# EAGLE board beacon3v08tdip (EAGLE 6.1)
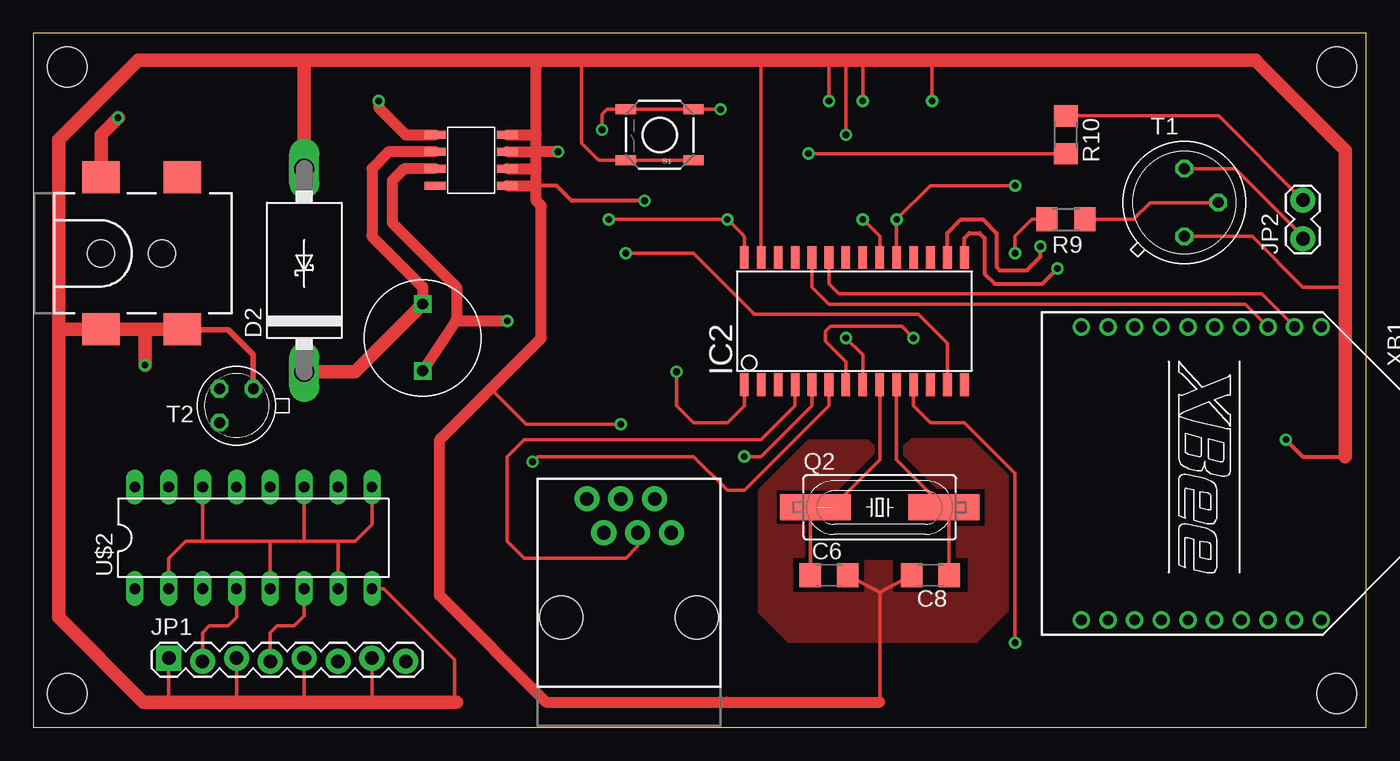
[diagram p0: board, top side]
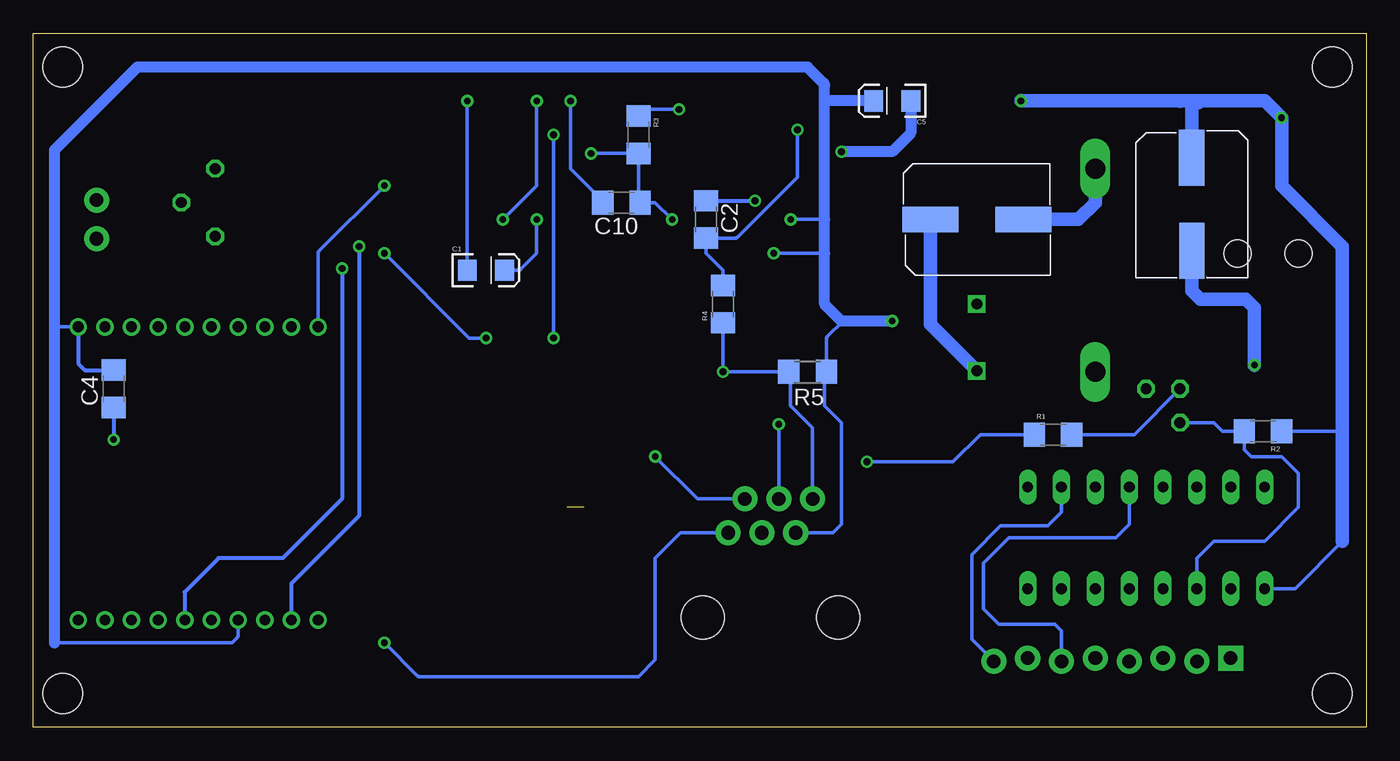
[diagram p1: board, bottom side, seen from below]

Size 100 x 52.06 mm. Coordinates in mm from the lower left corner, seen from the top.
Outline: 0,0 100,0 100,52.06 0,52.06 0,0
Copper layers (1*16): Top 0.035mm / dielectric 1.5mm / Bottom 0.035mm
Design rules: minimum track width 10mil, minimum drill 15mil, track to track 8mil, track to pad 8mil, pad to pad 5mil, via to via 8mil, smd to smd 8mil, copper to edge 40mil, drill to drill 8mil, minimum pad ring 10mil, minimum via ring 8mil, stop-mask expansion 4mil, vias tented up to drill 0mil, thermal gap 10mil
Holes 3 mm at 2.54,49.53 97.79,49.53 2.54,2.54 97.79,2.54

## Footprints (pad centres in the part's own frame; a part is rotated, then mirrored left to right if it is on the bottom)
EIA3216 = smd 1.4 x 1.6: A 1.4,0; C -1.4,0
C1206 = smd 1.6 x 1.8: 1 -1.4,0; 2 1.4,0
ECAPSMPS = smd 4.2 x 1.9: P$1 -3.481,-0.009; P$2 3.496,0.005
DO201T15 = drill 1.499 long: A 7.62,0; C -7.62,0
SO28W = smd 0.65 x 1.7: 1 -7.62,-4.78; 2 -6.35,-4.78; 3 -5.08,-4.78; 4 -3.81,-4.78; 5 -2.54,-4.78; 6 -1.27,-4.78; 7 0,-4.78; 8 1.27,-4.78; 9 2.54,-4.78; 10 3.81,-4.78; 11 5.08,-4.78; 12 6.35,-4.78; 13 7.62,-4.78; 14 8.89,-4.78; 15 8.89,4.78; 16 7.62,4.78; 17 6.35,4.78; 18 5.08,4.78; 19 3.81,4.78; 20 2.54,4.78; 21 1.27,4.78; 22 0,4.78; 23 -1.27,4.78; 24 -2.54,4.78; 25 -3.81,4.78; 26 -5.08,4.78; 27 -6.35,4.78; 28 -7.62,4.78
POWER_JACK_SMD = smd 2.8 x 2.4: GND 0,-5.7; P$4 6.1,-5.7; VIN0 0,5.7; VIN1 6.1,5.7 | hole 2.032: 0,0; 4.572,0
RJ11-6 = drill 1.016 pad 1.88: 1 1.905,8.89; 2 3.175,6.35; 3 4.445,8.89; 4 5.715,6.35; 5 6.985,8.89; 6 8.255,6.35 | hole 3.251: 0,0; 10.16,0
1X08_LOCK = drill 1.016 pad 1.88 square: 1 0,0.127 | drill 1.016 pad 1.88: 2 2.54,-0.127; 3 5.08,0.127; 4 7.62,-0.127; 5 10.16,0.127; 6 12.7,-0.127; 7 15.24,0.127; 8 17.78,-0.127
1X02_LOCK = drill 1.016 pad 1.88: 1 -0.178,0; 2 2.718,0
HC49UP = smd 5.334 x 1.93: 1 -4.826,0; 2 4.826,0
1206 = smd 1.6 x 1.8: 1 -1.4,0; 2 1.4,0
R1206 = smd 1.6 x 1.803: 1 -1.422,0; 2 1.422,0
TACTILE_SWITCH_SMD = smd 1.524 x 0.762: 1 -2.54,1.905; 2 2.54,1.905; 3 -2.54,-1.905; 4 2.54,-1.905
TO5 = drill 0.813 octagon: 1 0,-2.54; 2 2.54,0; 3 0,2.54
TO18 = drill 0.813 octagon: 1 -1.27,-1.27; 2 1.27,-1.27; 3 1.27,1.27
DIL16 = drill 0.813 long: 1 -8.89,-3.81; 2 -6.35,-3.81; 3 -3.81,-3.81; 4 -1.27,-3.81; 5 1.27,-3.81; 6 3.81,-3.81; 7 6.35,-3.81; 8 8.89,-3.81; 9 8.89,3.81; 10 6.35,3.81; 11 3.81,3.81; 12 1.27,3.81; 13 -1.27,3.81; 14 -3.81,3.81; 15 -6.35,3.81; 16 -8.89,3.81
BUCK = smd 1.55 x 0.6: P$5 -2.88,1.27; P$6 -2.88,0; P$7 -2.88,-1.27; P$8 -2.88,-2.54; P$9 2.54,-2.54; P$10 2.54,-1.27; P$11 2.54,0; P$12 2.54,1.27
BUCKINDUCTOR2 = drill 0.8 square: P$1 0,0; P$2 5,0
XBEE = drill 0.8 pad 1.27: 1 -11,9; 2 -11,7; 3 -11,5; 4 -11,3; 5 -11,1; 6 -11,-1; 7 -11,-3; 8 -11,-5; 9 -11,-7; 10 -11,-9; 11 11,-9; 12 11,-7; 13 11,-5; 14 11,-3; 15 11,-1; 16 11,1; 17 11,3; 18 11,5; 19 11,7; 20 11,9

## Placement (x,y rotation side)
C1  10uF  [EIA3216]  66.04,34.29 0 bottom
C2  .1uF  [C1206]  49.53,38.1 270 bottom
C4  .1uF  [C1206]  93.98,25.4 90 bottom
C5  [EIA3216]  35.56,46.99 180 bottom
C6  22pF  [C1206]  59.69,11.43 0 top
C8  22pF  [C1206]  67.31,11.43 180 top
C10  .1uF  [C1206]  55.88,39.37 180 bottom
C11  [ECAPSMPS]  13.08,39.24 270 bottom
C12  [ECAPSMPS]  29.21,38.1 0 bottom
D2  1N5820  [DO201T15]  20.32,34.29 90 top
IC2  PIC24FJ16GA002  [SO28W]  60.96,30.48 0 top
J1  POWER_JACKSMD  [POWER_JACK_SMD]  5.08,35.56 0 top
J2  RJ11-6PTH  [RJ11-6]  39.62,8.25 0 top
JP1  [1X08_LOCK]  10.16,5.08 0 top
JP2  [1X02_LOCK]  95.25,36.83 90 top
Q2  8MHz  [HC49UP]  63.5,16.51 0 top
R1  [1206]  23.5,21.97 0 bottom
R2  [1206]  7.75,22.22 180 bottom
R3  10k  [1206]  54.61,44.45 270 bottom
R4  200  [1206]  48.26,31.75 90 bottom
R5  4.7k  [R1206]  41.91,26.67 180 bottom
R9  [R1206]  77.47,38.1 180 top
R10  [R1206]  77.47,44.45 270 top
S1  [TACTILE_SWITCH_SMD]  46.99,44.45 180 top
T1  2N2405  [TO5]  86.36,39.37 0 top
T2  2N2222  [TO18]  15.24,24.13 180 top
U$2  CD4049  [DIL16]  16.51,14.22 0 top
U$3  BUCK1  [BUCK]  33.02,43.18 0 top
U$4  47uH  [BUCKINDUCTOR2]  29.21,31.75 270 top
XB1  XBEE  [XBEE]  87.63,19.05 270 top

## Library data of the parts
C1 C5 R1-R4 = SparkFun-Passives
C2 C4 C6 C8 C10 = resistor
C11 C12 IC2 U$2-U$4 = beacon
D2 = diode
J1 J2 JP1 JP2 = SparkFun-Connectors
Q2 = crystal; OC_FARNELL: unknown; OC_NEWARK: unknown
R5 R9 R10 = rcl
S1 = SparkFun-Electromechanical
T1 T2 = transistor
XB1 = maxstream; MPN: XBP24-Z7UIT-004; OC_FARNELL: 1751799; OC_NEWARK: 34R5507

## Nets
3.3V: C4.2 C5.A C10.1 C12.P$1 IC2.13 IC2.28 J2.2 R3.2 R5.1 R10.2 U$3.P$7 U$4.P$2 XB1.1 XB1.14
12V: C11.P$1 J1.VIN0 R2.1 U$2.1 U$3.P$5
GND: C1.C C2.1 C4.1 C5.C C6.2 C8.2 C10.2 C11.P$2 C12.P$2 D2.A IC2.8 IC2.19 IC2.27 J1.GND J1.P$4 J2.3 JP1.1 JP1.3 JP1.5 JP1.7 S1.1 S1.2 T1.1 T2.1 U$2.8 U$3.P$9 U$3.P$10 U$3.P$11 U$3.P$12 XB1.10
N$1: IC2.6 R1.1
N$2: R1.2 T2.2
N$3: JP1.2 U$2.4
N$4: JP2.2 R10.1
N$5: JP1.4 U$2.6
N$6: IC2.23 XB1.2
N$7: JP1.8 U$2.10
N$8: IC2.24 XB1.3
N$9: IC2.4 J2.4
N$10: C1.A IC2.20
N$11: C2.2 R3.1 R4.2 S1.3 S1.4
N$12: IC2.1 J2.1 R4.1 R5.2
N$13: IC2.16 XB1.12
N$14: D2.C U$3.P$6 U$4.P$1
N$15: R2.2 T2.3 U$2.3
N$16: IC2.7 R9.2
N$17: JP1.6 U$2.12
N$18: JP2.1 T1.3
N$19: IC2.5 J2.5
N$20: IC2.11 J2.6
N$21: U$2.2 U$2.5 U$2.7 U$2.9 U$2.11 U$2.14
N$22: C6.1 IC2.9 Q2.1
N$23: IC2.15 XB1.16
N$24: C8.1 IC2.10 Q2.2
N$25: R9.1 T1.2

## Tracks (layer width: path | path; a pad name or v marks a point on that pad's centre or on a via)
3.3V  (via drill 0.51)
  Top 0.254: 31.75,30.48 31.67,30.48 | IC2.28 53.34,36.73 arc45 53.27,36.9 v52.07,38.1 v43.18,38.1 | R10.2 58.23,43.03 arc-45 v58.17,43.05 | IC2.13 68.58,28.72 arc45 68.51,28.9 66.42,30.99 54.21,30.99 arc-45 54.03,31.06 49.53,35.56 v44.45,35.56
  Top 0.813: v35.56,30.48 31.75,30.48 31.75,33.02 27,37.77 arc-45 26.92,37.95 26.92,41.02 27.74,41.84 arc-45 27.92,41.91 U$3.P$7 | 31.67,30.48 U$4.P$2
  Bottom 0.254: v58.17,43.05 R3.2 54.61,39.5 C10.1 53.34,39.37 v52.07,38.1 | 39.27,30.48 40.41,29.33 arc-45 40.49,29.15 R5.1 40.64,26.52 40.64,24.13 39.37,22.86 39.37,15.24 40.01,14.61 J2.2 | v43.18,38.1 40.64,38.1 | v44.45,35.56 40.64,35.56 | XB1.14 84.63,6.92 arc45 84.7,6.74 85.09,6.35 98.42,6.35 | XB1.1 98.24,30.05 arc-45 98.42,29.98 98.42,29.97
  Bottom 0.305: XB1.1 96.63,27.29 96.14,26.8 C4.2
  Bottom 0.813: v35.56,30.48 39.27,30.48 arc45 39.44,30.55 40.64,31.75 40.64,35.56 40.64,38.1 40.64,46.99 | 40.64,46.99 40.64,48.16 arc-45 40.71,48.33 41.91,49.53 92.2,49.53 98.42,43.31 98.42,29.97 98.42,6.35 | C5.A 40.64,46.99
  Bottom 1.016: C12.P$1 32.69,30.23 U$4.P$2
12V  (via drill 0.51)
  Top 0.813: v25.91,46.99 25.91,46.48 27.94,44.45 U$3.P$5
  Top 1.016: J1.VIN0 5.08,44.45 v6.35,45.72
  Bottom 0.254: 1.91,16.38 1.78,16.51 | R2.1 2.03,22.22 1.78,22.48 | U$2.1 5.33,10.41 1.78,13.97
  Bottom 1.016: 1.78,13.97 1.78,16.51 1.78,22.48 1.78,36.07 6.35,40.64 v6.35,45.72 7.62,46.99 12.7,46.99 | 12.7,46.99 13.97,46.99 | 13.97,46.99 v25.91,46.99 | 13.98,46.98 13.97,46.99 | 12.58,46.87 12.7,46.99 | C11.P$1 13.09,46.6 12.7,46.99
GND  (via drill 0.51)
  Top 0.254: JP1.7 25.4,1.91 | JP1.5 20.32,1.91 | JP1.3 15.24,1.91 | JP1.1 10.16,2.16 10.41,1.91 | 31.75,1.91 31.62,2.03 31.62,5.08 26.29,10.41 U$2.8 | 23.62,49.68 arc-45 23.7,49.86 23.88,50.04 | 41.15,50.04 41.15,43.81 42.34,42.62 arc45 42.52,42.55 S1.2 S1.1 | IC2.27 54.61,50.04 | v59.69,46.99 59.69,50.04 | IC2.19 v64.77,38.1 67.24,40.57 arc-45 67.42,40.64 v73.66,40.64 | v62.23,46.99 62.23,50.04 | v60.96,44.45 60.96,50.04 | C6.2 63.5,10.16 | 63.5,10.16 63.5,1.91 63.5,1.78 | 63.5,10.16 C8.2 | 52.07,1.91 52.07,1.78 | 98.14,36.65 arc45 98.32,36.73 98.42,36.83 | v67.44,46.99 67.44,49.81 arc45 67.36,49.98 67.31,50.04 | 98.42,33.02 95.25,33.02 91.44,36.83 T1.1 | IC2.8 62.23,27.94 v60.96,29.21 | v44.07,22.73 36.96,22.73 34.29,25.4
  Top 0.305: v45.85,39.5 40.39,39.5 39.24,40.64 37.72,40.64 | v93.98,21.59 95.25,20.32 98.42,20.32
  Top 0.406: T2.1 16.51,27.94 14.61,29.84 11.22,29.84 arc-45 J1.P$4 11.2,29.84
  Top 0.813: 37.72,40.64 37.72,39.5 38.1,39.12 38.1,29.21 34.29,25.4 30.55,21.66 arc45 30.48,21.48 30.48,9.91 38.48,1.91 52.07,1.91 63.5,1.91 | 37.72,40.64 37.72,41.91 | 37.72,41.91 37.72,43.18 | 37.72,43.18 37.72,44.45 | 37.72,44.45 37.72,49.55 arc-45 37.79,49.73 38.1,50.04 | U$3.P$9 37.72,40.64 | U$3.P$10 37.72,41.91 | U$3.P$11 37.72,43.18 | U$3.P$12 37.72,44.45 | v39.37,43.18 37.72,43.18
  Top 1.016: 31.75,1.91 25.4,1.91 20.32,1.91 15.24,1.91 10.41,1.91 8.26,1.91 1.91,8.25 1.91,29.97 | 20.32,50.04 7.87,50.04 1.91,44.07 1.91,29.97 | 20.32,50.04 23.88,50.04 38.1,50.04 41.15,50.04 54.61,50.04 59.69,50.04 60.96,50.04 62.23,50.04 67.31,50.04 91.72,50.04 91.72,50.02 98.42,43.31 98.42,36.83 98.42,33.02 98.42,20.32 | D2.A 20.32,50.04 | 1.91,29.97 1.94,29.93 arc45 2.12,29.86 J1.GND 8.38,29.86 | 8.38,29.86 J1.P$4 | v8.38,27.18 8.38,29.86
  Bottom 0.254: C10.2 57.28,39.39 arc-45 57.35,39.57 59.69,41.91 v59.69,46.99 | v64.77,38.1 62.23,40.64 v62.23,46.99 | XB1.10 78.63,35.56 arc45 78.56,35.74 v73.66,40.64 | C1.C v67.44,46.98 arc45 v67.44,46.99 | v60.96,29.21 v60.96,44.45 | J2.3 v44.07,22.73
  Bottom 0.305: C2.1 v45.85,39.5 | C4.1 v93.98,21.59
  Bottom 0.813: C5.C 34.16,44.58 U$3.P$11 v39.37,43.18
  Bottom 1.016: D2.A 20.32,39.37 21.59,38.1 C12.P$2 | C11.P$2 13.08,32.76 12.45,32.13 9.02,32.13 8.38,31.5 v8.38,27.18
  pour Top (isolate 0.254): 64.39,12.45 64.39,10.03 70.23,10.03 70.23,12.83 69.34,12.83 69.34,14.99 71.5,14.99 71.5,18.03 67.82,18.03 65.41,20.45 65.41,21.08 65.91,21.59 70.36,21.59 72.77,19.18 73.03,18.92 73.03,8.76 70.74,6.48 56.64,6.48 54.48,8.64 54.48,17.78 58.17,21.46 62.61,21.46 62.99,21.08 62.99,20.57 60.58,18.16 60.33,17.91 55.63,17.91 55.63,15.11 57.78,15.11 57.78,12.83 56.9,12.83 56.9,10.03 62.48,10.03 62.48,12.45
N$1  (via drill 0.51)
  Top 0.254: IC2.6 59.69,24.13 53.34,17.78 52.07,17.78 49.53,20.32 37.85,20.32 v37.47,19.94
  Bottom 0.254: v37.47,19.94 30.99,19.94 28.96,21.97 R1.1
N$2
  Bottom 0.254: R1.2 17.4,21.97 T2.2
N$3
  Top 0.254: U$2.4 15.24,8.25 14.61,7.62 13.21,7.62 12.7,7.11 JP1.2
N$4
  Top 0.254: R10.1 88.93,45.87 JP2.2
N$5
  Top 0.254: U$2.6 20.32,8.38 19.56,7.62 18.29,7.62 17.78,7.11 JP1.4
N$6
  Top 0.254: IC2.23 59.69,33.27 60.45,32.51 92.17,32.51 XB1.2
N$7
  Bottom 0.254: U$2.10 22.86,16.13 23.88,15.11 27.43,15.11 29.59,12.95 29.59,6.6 JP1.8
N$8
  Top 0.254: IC2.24 58.42,33.02 59.69,31.75 90.93,31.75 XB1.3
N$9
  Top 0.254: J2.4 45.34,13.59 44.45,12.7 36.83,12.7 35.56,13.97 35.56,20.32 36.83,21.59 54.61,21.59 57.15,24.13 IC2.4
N$10  (via drill 0.51)
  Top 0.254: v62.23,38.1 63.5,36.83 IC2.20
  Bottom 0.254: C1.A 63.6,34.29 arc-45 63.43,34.36 62.23,35.56 v62.23,38.1
N$11  (via drill 0.51)
  Top 0.254: v51.56,46.35 S1.3 S1.4 43.05,46.35 42.75,46.05 arc45 42.67,45.87 v42.67,44.83
  Bottom 0.254: R4.2 48.26,34.29 49.53,35.56 C2.2 47.35,36.7 arc-45 47.17,36.77 42.67,41.27 v42.67,44.83 | v51.56,46.35 54.1,46.35 R3.1
N$12  (via drill 0.51)
  Top 0.254: IC2.1 53.34,24.13 52.07,22.86 49.53,22.86 48.26,24.13 v48.26,26.67
  Bottom 0.254: R4.1 v48.26,26.67 R5.2 43.18,26.52 43.18,24.13 41.53,22.48 J2.1
N$13  (via drill 0.51)
  Top 0.305: IC2.16 68.58,37.08 69.6,38.1 71.25,38.1 72.26,37.08 72.26,34.54 72.52,34.29 74.55,34.29 75.56,35.31 v75.56,36.07
  Bottom 0.305: v75.56,36.07 75.56,15.88 80.64,10.8 80.64,8.07 XB1.12
N$14
  Top 0.813: U$3.P$6 26.77,43.18 arc45 26.6,43.11 25.4,41.91 25.4,36.94 arc45 25.47,36.76 29.21,33.02 U$4.P$1
  Top 1.016: U$4.P$1 24.13,26.67 D2.C
N$15
  Bottom 0.254: T2.3 11.43,22.86 10.79,22.22 R2.2 9.14,20.83 8.64,20.32 6.35,20.32 5.08,19.05 5.08,16.51 7.62,13.97 11.43,13.97 12.7,12.7 U$2.3
N$16  (via drill 0.51)
  Top 0.254: IC2.7 60.96,27.43 59.44,28.96 59.44,29.72 59.82,30.1 65.15,30.1 v66.04,29.21 | v73.66,35.56 73.66,36.83 74.93,38.1 R9.2
  Bottom 0.254: v66.04,29.21 67.31,29.21 v73.66,35.56
N$17
  Bottom 0.254: U$2.12 17.78,15.24 18.8,14.22 26.8,14.22 28.7,12.32 28.7,8.89 27.56,7.75 23.37,7.75 22.86,7.24 JP1.6
N$18
  Top 0.254: JP2.1 95.25,36.83 90.17,41.91 T1.3
N$19  (via drill 0.51)
  Top 0.254: v53.34,20.32 54.61,20.32 58.42,24.13 IC2.5
  Bottom 0.254: J2.5 50.16,17.14 v53.34,20.32
N$20  (via drill 0.51)
  Top 0.254: v73.66,6.35 73.66,19.05 69.85,22.86 67.42,22.86 arc-45 67.24,22.93 66.04,24.13 IC2.11
  Bottom 0.254: v73.66,6.35 71.19,3.88 arc-45 71.02,3.81 54.61,3.81 53.34,5.08 53.34,12.7 51.44,14.61 J2.6
N$21
  Top 0.254: U$2.2 10.16,12.7 11.43,13.97 12.7,13.97 | 12.7,13.97 17.78,13.97 | 17.78,13.97 20.32,13.97 | 20.32,13.97 22.86,13.97 | 22.86,13.97 24.13,13.97 25.4,15.24 U$2.9 | U$2.14 12.7,13.97 | U$2.7 22.86,13.97 | U$2.5 17.78,13.97 | U$2.11 20.32,13.97
N$22  (1 unrouted)
  Top 0.254: C6.1 58.29,16.13 Q2.1 | IC2.9 63.5,20.07 59.94,16.51
N$23  (via drill 0.51)
  Top 0.305: IC2.15 69.85,36.7 70.23,37.08 70.99,37.08 71.37,36.7 71.37,34.04 72.14,33.27 75.69,33.27 v76.83,34.42
  Bottom 0.305: v76.83,34.42 76.83,17.14 81.28,12.7 86.11,12.7 88.65,10.16 88.65,8.07 XB1.16
N$24
  Top 0.254: C8.1 68.71,16.13 Q2.2 64.77,20.07 IC2.10
N$25
  Top 0.254: R9.1 82.44,38.1 arc45 82.62,38.17 83.82,39.37 T1.2